# Altium PCB PCB_KKN Kemuning_FIXXX.pcbdoc
Units mil, origin at the board's own origin, x right, y up, seen from the top; angles counter-clockwise.
Board outline 5080 x 4540 mil, 2 copper layers (Top Layer, Bottom Layer); 20 components, 50 nets, 105 pads, 5 vias.
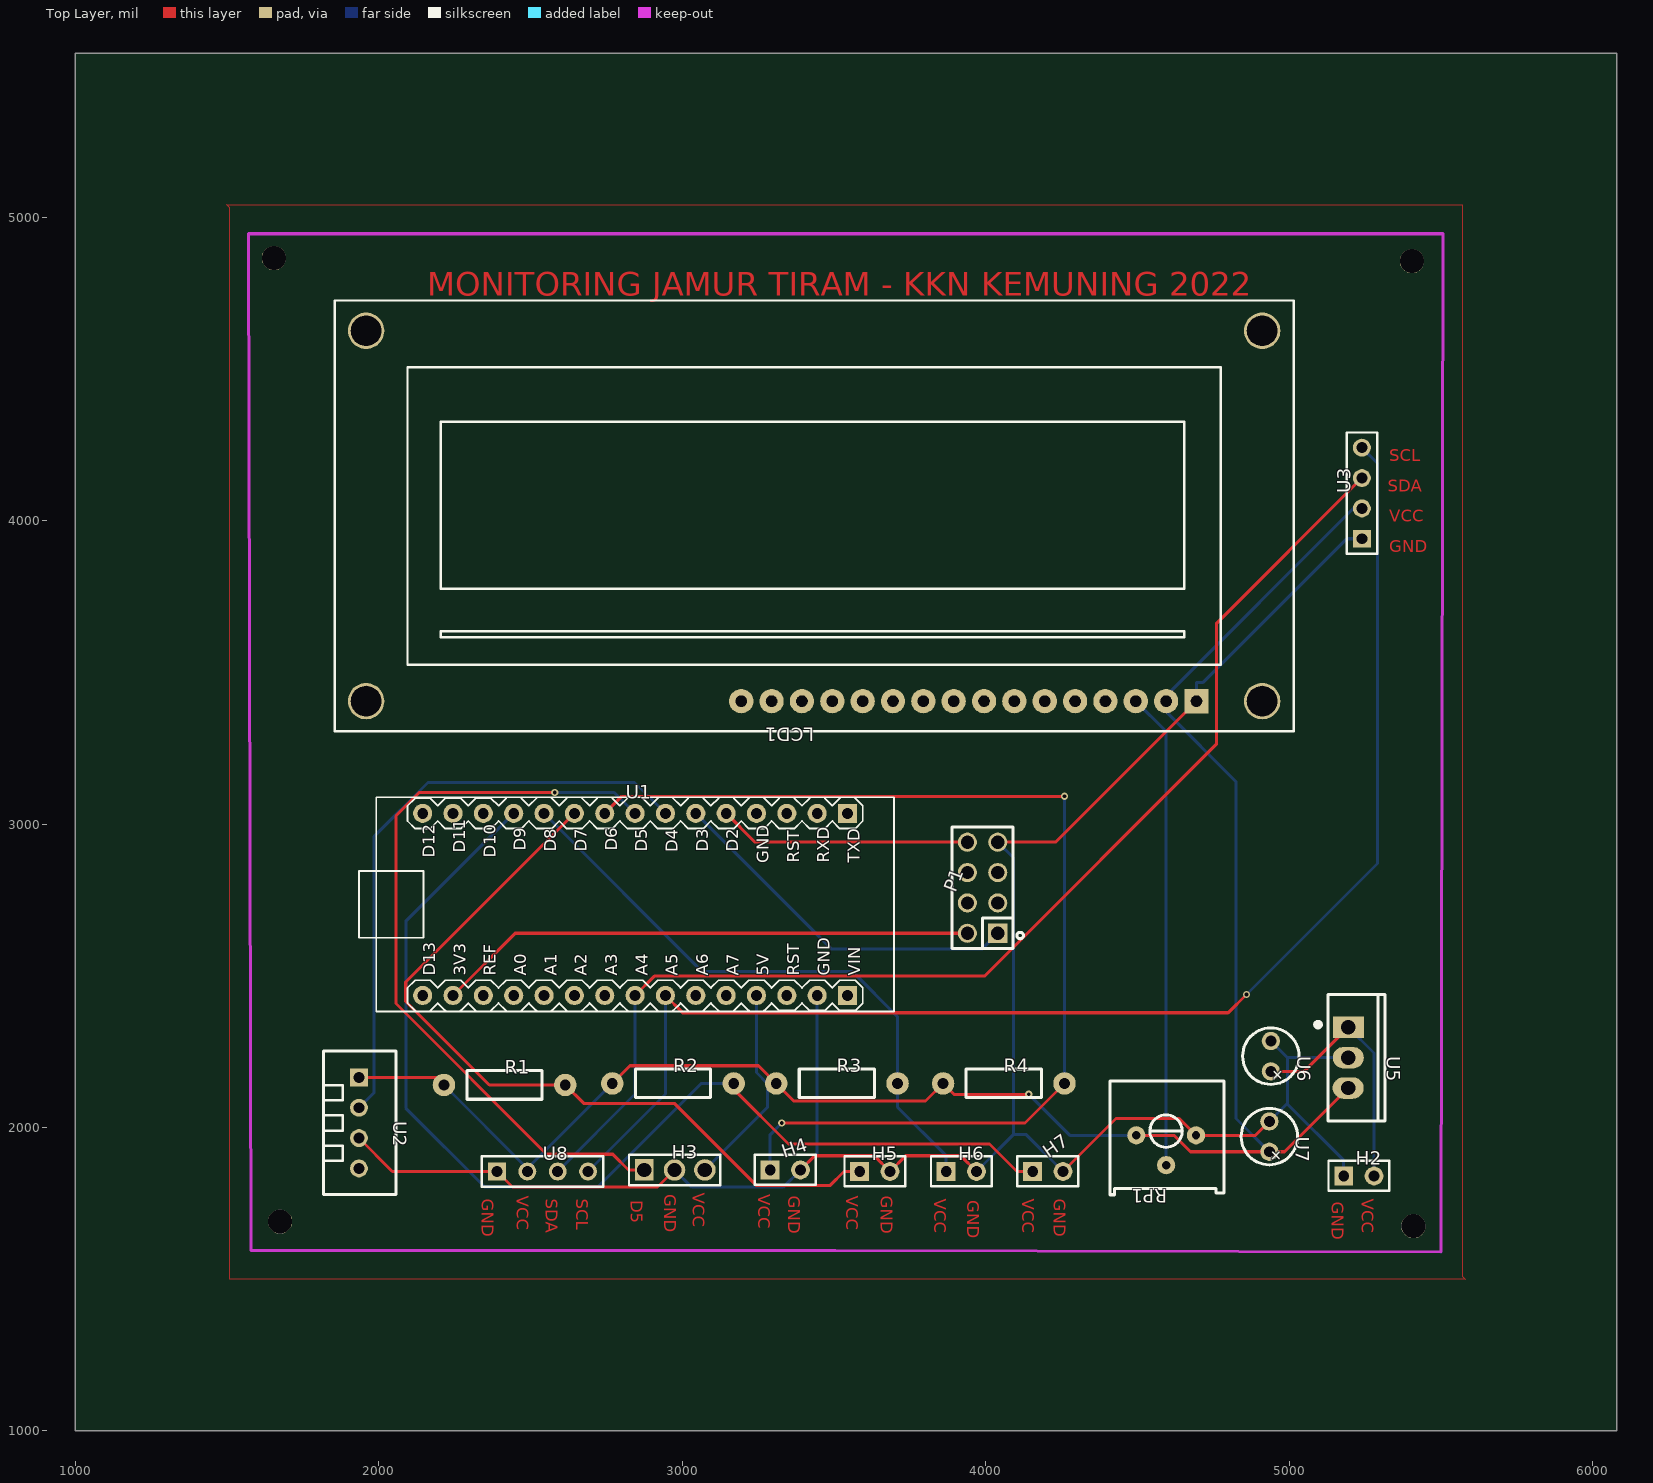
[diagram p0: Top Layer view]
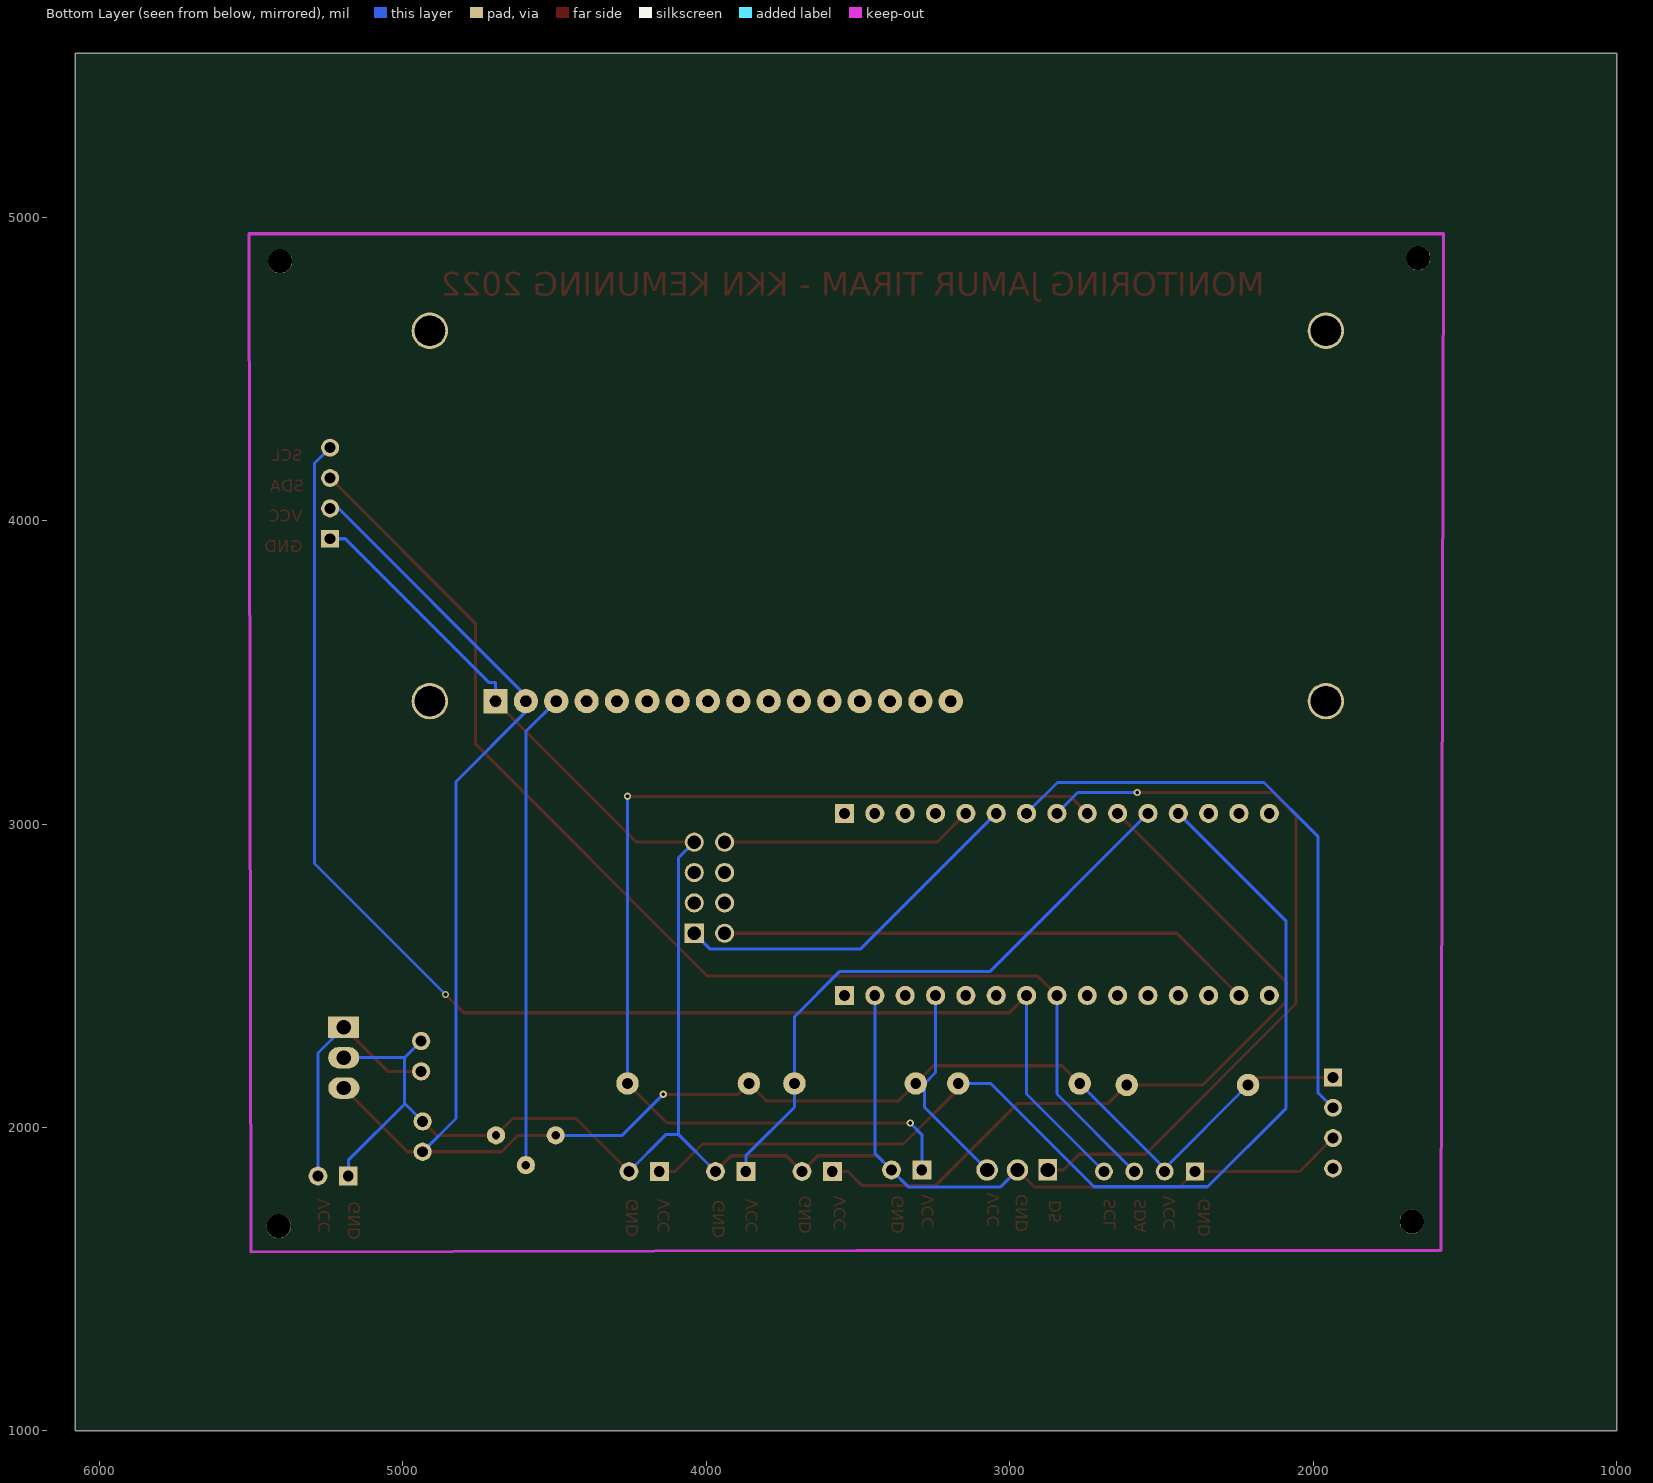
[diagram p1: Bottom Layer view, seen from below]

## Layer stack, top to bottom
Top Layer: signal copper (thickness not stored)
Dielectric: dielectric 12.6, FR-4, Dk 4.8
Bottom Layer: signal copper (thickness not stored)

## Board outline
6080,1000 1000,1000 1000,5540 6080,5540

## Components (designator, comment, footprint, x,y, rotation, side; value= is the part's Value field where it differs from the comment)
H2 "PSU" HDR-F-2.54_1X2 5230,1840 r0 top
H3 "Header 3" HDR-TH_3P-P2.54-V-M-1 2975,1860 r0 top
H4 "PB1" HDR-F-2.54_1X2 3340,1860 r0 top
H5 "PB2" HDR-F-2.54_1X2 3635,1855 r0 top
H6 "PB3" HDR-F-2.54_1X2 3920,1855 r0 top
H7 "PB4" HDR-F-2.54_1X2 4205,1855 r0 top
LCD1 "LMB162ADC" LCD1602 3435,4015 r180 top
P1 "ESP8266-TH8" HDR-TH_8P-P2.54-V-F-R2-C4-S2.54-1 3990,2790 r90 top
R1 "1k" R_AXIAL-0.4 2415,2140 r0 top
R2 "1k" R_AXIAL-0.4 2970,2145 r0 top
R3 "1k" R_AXIAL-0.4 3510,2145 r0 top
R4 "1k" R_AXIAL-0.4 4060,2145 r0 top
RP1 "R_3386P_US" RES-ADJ-TH_3386P 4595,1925 r180 top
U1 "ARDUINO_NANO" COMM-TH_ARDUINO_NANO 2845,2735 r0 top
U2 "DHT22" ? 1935,2015 r270 top
U3 "Output PCF8574" HDR1X4 5240,4090 r90 top
U5 "L7805CV_C519074" TO-220-3_L10.0-W4.5-P2.54-L 5195,2230 r270 top
U6 "capasitor +" CAPASITOR+ 4940,2185 r270 top
U7 "capasitor +" CAPASITOR+ 4935,1920 r270 top
U8 "RTC" HDR1X4 2540,1855 r0 top

## Footprints (in the part's own frame and the unit in brackets; to place one, negate y for a bottom-side part, rotate by r counter-clockwise, add the part's x,y. Pads: shape width x height; smd on the part's side, far side on the other; paste and mask are expansions set on the pad)
CAPASITOR+ [mil]
  round 60 hole 36: 1(-100,0) 2(0,0)
  silkscreen extent -143,-93 43,93
COMM-TH_ARDUINO_NANO [mm]
  rect 1.6x1.6 hole 0.9: 1(17.78,7.62) 30(17.78,-7.62)
  round 1.6 hole 0.9: 2(15.24,7.62) 3(12.7,7.62) 4(10.16,7.62) 5(7.621,7.62) 6(5.08,7.62) 7(2.541,7.62) 8(0,7.62) 9(-2.539,7.62) 10(-5.08,7.62) 11(-7.619,7.62) 12(-10.16,7.62) 13(-12.699,7.62) 14(-15.24,7.62) 15(-17.78,7.62) 16(-17.78,-7.62) 17(-15.241,-7.62) 18(-12.7,-7.62) 19(-10.161,-7.62) 20(-7.62,-7.62) 21(-5.081,-7.62) 22(-2.54,-7.62) 23(-0.001,-7.62) 24(2.54,-7.62) 25(5.079,-7.62) 26(7.62,-7.62) 27(10.159,-7.62) 28(12.7,-7.62) 29(15.24,-7.62)
  silkscreen extent -23.11,-8.97 21.67,8.97
HDR1X4 [mil]
  rect 59x59 hole 36: 1(-150,0)
  round 59 hole 36: 2(-50,0) 3(50,0) 4(150,0)
  silkscreen extent -200,-50 200,50
HDR-F-2.54_1X2 [mil]
  rect 62x62 hole 35: 1(-50,0)
  round 62 hole 35: 2(50,0)
  silkscreen extent -100,-49 100,50
HDR-TH_3P-P2.54-V-M-1 [mm]
  rect 1.575x1.8 hole 1.2: 1(-2.54,0)
  round 1.8 hole 1.2: 2(0,0) 3(2.54,0)
  silkscreen extent -3.81,-1.27 3.81,1.27
HDR-TH_8P-P2.54-V-F-R2-C4-S2.54-1 [mm]
  rect 1.6x1.6 hole 1.1: 1(-3.81,-1.27)
  round 1.6 hole 1.1: 2(-3.81,1.27) 3(-1.27,-1.27) 4(-1.27,1.27) 5(1.27,-1.27) 6(1.27,1.27) 7(3.81,-1.27) 8(3.81,1.27)
  silkscreen extent -5.1,-3.42 5.1,2.55
LCD1602 [mm]
  round 3.048 hole 2.54 slot 2.545 at 0 deg: 0(-37.5,-15.5) 0(-37.5,15.5) 0(37.5,-15.5) 0(37.5,15.5)
  rect 2.032x2.032 hole 0.945: 1(-32,15.5)
  round 2.032 hole 0.945: 2(-29.46,15.5) 3(-26.92,15.5) 4(-24.38,15.5) 5(-21.84,15.5) 6(-19.3,15.5) 7(-16.76,15.5) 8(-14.22,15.5) 9(-11.68,15.5) 10(-9.14,15.5) 11(-6.6,15.5) 12(-4.06,15.5) 13(-1.52,15.5) 14(1.02,15.5) 15(3.56,15.5) 16(6.1,15.5)
  silkscreen extent -40.13,-18.03 40.13,18.03
R_AXIAL-0.4 [mil]
  round 74 hole 35.4: 1(-200,0) 2(200,0)
  silkscreen extent -124,-47 124,47
RES-ADJ-TH_3386P [mil]
  round 60 hole 27.56: 1(98.43,-49.21) 2(0.01,49.22) 3(-98.43,-49.21)
  silkscreen extent -190,-228 185,147
TO-220-3_L10.0-W4.5-P2.54-L [mm]
  rect 1.8x2.6 hole 1.2: 1(-2.54,0.005)
  oval 1.8x2.6 hole 1.2: 2(0,0.005) 3(2.54,-0.005)
  silkscreen extent -5.3,-2.73 5.3,3.09
? [mm]
  rect 1.5x1.5 hole 0.9: 1(-3.81,0)
  round 1.5 hole 0.9: 2(-1.27,0) 3(1.27,0) 4(3.81,0)
  silkscreen extent -6.02,-2.96 5.98,3.1

## Free pads (board coordinates)
  round 80 hole 80 unplated: ""(1655,4865) ""(1675,1690) ""(5405,4855) ""(5410,1675)

## Via types
v1: diameter 24.02, hole 12.01, Top Layer to Bottom Layer, tented both sides, 5 vias

## Nets (pads, with @x,y where several pads share a name; then routed paths per layer and width w, separated by ;. In a path a pad name is that pad's centre, name@x,y a point inside that pad or via, vN(x,y) a via of type N, cw(c..) or ccw(c..) an arc to the next point about the centre after c; other vN are vias at no path point)
3V3: P1.2 U1.17 | length 1779.9
  Top Layer w10: U1.17 2450,2640 P1.2
+5V: H3.3 LCD1.2 R1.1 R2.1 R3.1 R4.1 RP1.1 U1.27 U2.1 U3.2 U5.3 U7.2 U8.2 | length 7035.1
  Top Layer w10: U2.1 2190,2165 R1.1 ; R2.1 2828.32,2203.32 3251.68,2203.32 R3.1 3367.83,2087.17 3802.17,2087.17 R4.1 3895.64,2109.36 v1(4142.32,2109.36) ; RP1.1 4620.72,1974.21 4674.93,1920 U7.2 4984.8,1920 U5.3
  Bottom Layer w10: R1.1 U8.2@2490,1865 ; U8.2 U8.2@2490,1865 ; R2.1 U8.2@2490,1865 ; H3.3 3280.89,2065.89 R3.1@3280.89,2145 ; U1.27 3245,2180.89 R3.1@3280.89,2145 ; R3.1 R3.1@3280.89,2145 ; v1(4142.32,2109.36) 4277.47,1974.21 RP1.1 ; U7.2 4825.32,2029.68 4825.32,3139.43 4594.84,3369.91 LCD1.2 4594.84,3422.65 5212.19,4040 U3.2
A0: U1.19
A1: U1.20
A2: U1.21
A3: U1.22
A4: U1.23 U3.3 U8.3 | length 4019.9
  Top Layer w10: U1.23 2908.48,2498.48 3996.26,2498.48 4760.28,3262.5 4760.28,3660.28 U3.3
  Bottom Layer w10: U8.3 2845,2110 U1.23
A5: U1.24 U3.4 U8.4 | length 4650.6
  Top Layer w10: U1.24 3001.98,2378.02 4799.37,2378.02 v1(4859.74,2438.39)
  Bottom Layer w10: U8.4 2945,2110 U1.24 ; v1(4859.74,2438.39) 5291.26,2869.91 5291.26,4188.74 U3.4
D0: U1.2
D1: U1.1
D2: P1.8 U1.5 | length 834.4
  Top Layer w10: U1.5 3240,2940 P1.8
D3: P1.1 U1.6 | length 1202.2
  Bottom Layer w10: U1.6 3492.57,2587.43 3987.43,2587.43 P1.1
D4: U1.7 U2.2 | length 1990.6
  Bottom Layer w10: U2.2 1985.35,2115.35 1985.35,2959.48 2162.7,3136.83 2843.17,3136.83 U1.7
D5: H3.1 U1.8 | length 2512.6
  Top Layer w10: v1(2579.83,3104.01) 2133.79,3104.01 2056.85,3027.07 2056.85,2408.28 2553.36,1911.77 2771.46,1911.77 2823.23,1860 H3.1
  Bottom Layer w10: v1(2579.83,3104.01) 2775.99,3104.01 U1.8
D6: H4.1 R4.2 U1.9 | length 3640.5
  Top Layer w10: U1.9 2801.11,3091.11 v1(4260,3091.11) ; v1(3328.23,2014.51) 4129.51,2014.51 R4.2
  Bottom Layer w10: H4.1 3290,1976.28 v1(3328.23,2014.51) ; R4.2 v1(4260,3091.11)
D7: H5.1 R1.2 U1.10 | length 2616.5
  Top Layer w10: U1.10 2089.28,2479.28 2089.28,2415.22 2364.5,2140 R1.2 2675.47,2079.53 2974.19,2079.53 3245.54,1808.18 3486.41,1808.18 3533.23,1855 H5.1
D8: H6.1 R3.2 U1.11 | length 2018.8
  Bottom Layer w10: U1.11 3066.73,2513.27 3561.8,2513.27 3710,2365.07 R3.2 3710,2066.77 3870,1906.77 H6.1
D9: H7.1 R2.2 U1.12 | length 3563.2
  Top Layer w10: R2.2 3170,2126.33 3350.75,1945.58 4012.65,1945.58 4103.23,1855 H7.1
  Bottom Layer w10: U1.12 2089.63,2679.63 2089.63,2063.7 2348.65,1804.68 2722.61,1804.68 3062.93,2145 R2.2
D10: U1.13
D11: U1.14
D12: U1.15
D13: U1.16
E: LCD1.6
GND: H2.1 H3.2 H4.2 H5.2 H6.2 H7.2 LCD1.1 P1.7 RP1.3 U1.29 U2.3 U3.1 U5.2 U6.1 U7.1 U8.1 | length 7496.6
  Top Layer w10: U2.3 2045,1855 U8.1 2441.25,1803.75 2918.75,1803.75 H3.2 ; H4.2 3436.82,1906.82 3633.18,1906.82 H5.2 3736.82,1906.82 3918.18,1906.82 H6.2 ; P1.7 4230.08,2940 LCD1.1 ; H7.2 4429.6,2029.6 4638.03,2029.6 RP1.3 4889.21,1974.21 U7.1
  Bottom Layer w10: H3.2 3031.84,1803.16 3333.16,1803.16 H4.2 3445,1915 U1.29 ; H6.2 4092.32,1977.32 ; P1.7 4092.32,2887.68 4092.32,1977.32 ; H7.2 4132.68,1977.32 4092.32,1977.32 ; LCD1.1 4694.84,3465.53 4715.26,3465.53 5189.73,3940 U3.1 ; U7.1 4991.89,2076.89 4994.88,2076.89 ; U6.1 4994.88,2230.12 4994.88,2230.01 ; H2.1 5180,1891.77 4994.88,2076.89 ; U5.2 4994.88,2230.01 ; 4994.88,2076.89 4994.88,2230.01
LCD1_7: LCD1.7
LCD1_8: LCD1.8
LCD1_9: LCD1.9
LCD1_10: LCD1.10
LCD1_15: LCD1.15
LCD1_16: LCD1.16
P1_3: P1.3
P1_4: P1.4
P1_5: P1.5
P1_6: P1.6
P4: LCD1.11
P5: LCD1.12
P6: LCD1.13
P7: LCD1.14
RS: LCD1.4
RW: LCD1.5
U1_3: U1.3
U1_4: U1.4
U1_18: U1.18
U1_25: U1.25
U1_26: U1.26
U1_28: U1.28
U1_30: U1.30
U2_4: U2.4
U5_1: H2.2 U5.1 U6.2 | length 840.4
  Top Layer w10: U6.2 5050.18,2185 U5.1
  Bottom Layer w10: U5.1 5280,2245.2 H2.2
VEE: LCD1.3 RP1.2 | length 1570.5
  Bottom Layer w10: LCD1.3 4594.99,3304.61 RP1.2
pads on no net: LCD1.0

## Polygon pours and split planes (outlines as drawn)
GND on Top Layer (solid): 1510,1500 1510,5030 1500,5040 5570,5040 5570,1510 5580,1500 1510,1500

## Other copper
Top Layer:
  text "MONITORING JAMUR TIRAM - KKN KEMUNING 2022" at 2160,4740.63 h78.74
  text "SCL" at 5330,4195.31 h39.37
  text "SDA" at 5325,4095.32 h39.37
  text "VCC" at 5330,3995.32 h39.37
  text "GND" at 5330,3895.32 h39.37
  text "VCC" at 3035.32,1785 h39.37 r270
  text "GND" at 2940.32,1780 h39.37 r270
  text "VCC" at 3250.32,1780 h39.37 r270
  text "VCC" at 2455.32,1775 h39.37 r270
  text "GND" at 3350.32,1775 h39.37 r270
  text "VCC" at 3540.32,1775 h39.37 r270
  text "GND" at 3655.32,1775 h39.37 r270
  text "GND" at 2340.32,1765 h39.37 r270
  text "SDA" at 2550.32,1765 h39.37 r270
  text "SCL" at 2650.32,1765 h39.37 r270
  text "VCC" at 3830.32,1765 h39.37 r270
  text "VCC" at 4120.31,1765 h39.37 r270
  text "GND" at 4225.31,1765 h39.37 r270
  text "VCC" at 5240.31,1765 h39.37 r270
  text "D5" at 2830.32,1760 h39.37 r270
  text "GND" at 3940.32,1760 h39.37 r270
  text "GND" at 5140.31,1755 h39.37 r270

## Text inside footprints (layer, text, board x,y; h text height)
U1: Top Overlay "D13" at 2186.26,2499.17 h39.37 r90; Top Overlay "3V3" at 2286.26,2499.17 h39.37 r90; Top Overlay "REF" at 2386.26,2499.17 h39.37 r90; Top Overlay "A0" at 2486.26,2499.17 h39.37 r90; Top Overlay "A1" at 2586.26,2499.17 h39.37 r90; Top Overlay "A2" at 2686.26,2499.17 h39.37 r90; Top Overlay "A3" at 2786.26,2499.17 h39.37 r90; Top Overlay "A4" at 2886.26,2499.17 h39.37 r90; Top Overlay "A5" at 2986.26,2499.17 h39.37 r90; Top Overlay "A6" at 3086.26,2499.17 h39.37 r90; Top Overlay "A7" at 3186.26,2499.17 h39.37 r90; Top Overlay "5V" at 3286.26,2499.17 h39.37 r90; Top Overlay "RST" at 3386.26,2499.17 h39.37 r90; Top Overlay "GND" at 3486.26,2499.17 h39.37 r90; Top Overlay "VIN" at 3586.26,2499.17 h39.37 r90; Top Overlay "D12" at 2185.47,2888.5 h39.37 r90; Top Overlay "D11" at 2285.47,2904.6 h39.37 r90; Top Overlay "D10" at 2385.47,2888.5 h39.37 r90; Top Overlay "D9" at 2485.47,2911.1 h39.37 r90; Top Overlay "D8" at 2585.47,2909.3 h39.37 r90; Top Overlay "D7" at 2685.47,2909.3 h39.37 r90; Top Overlay "D6" at 2785.47,2911.1 h39.37 r90; Top Overlay "D5" at 2885.47,2909.3 h39.37 r90; Top Overlay "D4" at 2985.47,2907.5 h39.37 r90; Top Overlay "D3" at 3085.47,2909.3 h39.37 r90; Top Overlay "D2" at 3185.47,2909.3 h39.37 r90; Top Overlay "GND" at 3285.47,2870.6 h39.37 r90; Top Overlay "RST" at 3385.47,2872.4 h39.37 r90; Top Overlay "RXD" at 3485.47,2872.4 h39.37 r90; Top Overlay "TXD" at 3585.47,2872.4 h39.37 r90
U6: Top Overlay "+" at 4990.82,2168.92 h39.37 r135
U7: Top Overlay "+" at 4985.82,1903.92 h39.37 r135